# Altium PCB efm8bb1-breakout.PcbDoc
Units mil, origin at the board's own origin, x right, y up, seen from the top; angles counter-clockwise.
Board outline 600 x 800 mil, 2 copper layers (Top Layer, Bottom Layer); 3 components, 16 nets, 32 pads, 0 vias.
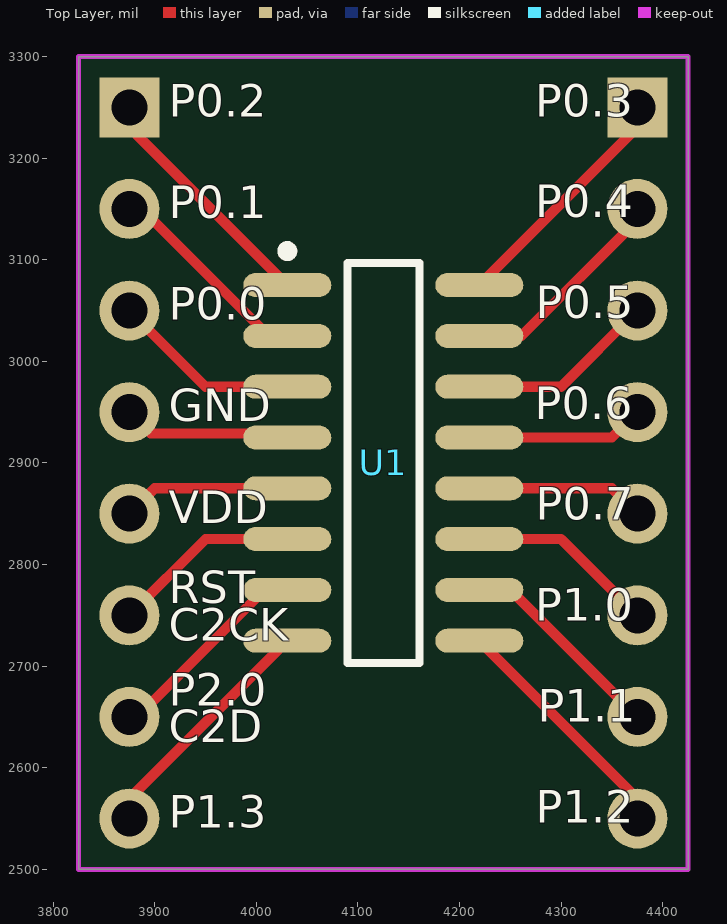
[diagram p0: Top Layer view]
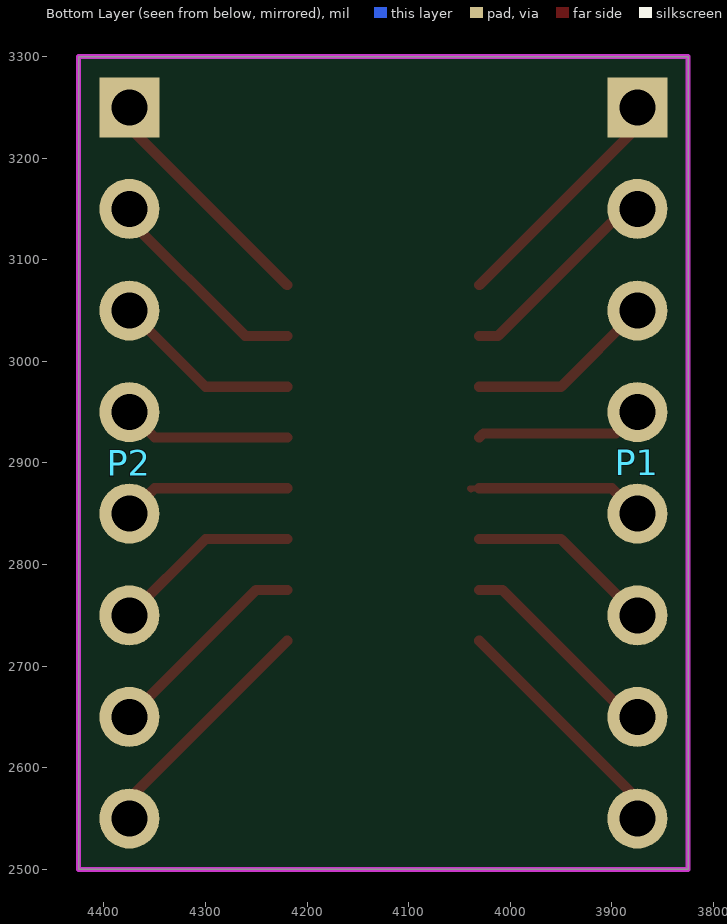
[diagram p1: Bottom Layer view, seen from below]

## Layer stack, top to bottom
Top Solder: solder mask 0.4, Solder Resist, Dk 3.5
Top Layer: signal copper 1.4
Dielectric 1: dielectric 12.6, FR-4, Dk 4.8
Bottom Layer: signal copper 1.4
Bottom Solder: solder mask 0.4, Solder Resist, Dk 3.5

## Board outline
3825,2500 4425,2500 4425,3300 3825,3300

## Design rules (kind name [scope] priority, off if disabled: settings)
Clearance [All] p1: gap=6 ignorepadtopadclearanceinfootprint=FALSE except(0: Arc-Hole Track-Hole SMDPad-Hole THPad-Hole Via-Hole Fill-Hole Poly-Hole Region-Hole Text-Hole)
ComponentClearance [All] p1: gap=0 collisioncheckmode=3 verticalgap=0 showdistances=FALSE
DiffPairsRouting [All] p1: maxlimit=10 minlimit=6 mostfreqgap=10 toplayer_minwidth=6 toplayer_maxwidth=15 toplayer_prefwidth=8 bottomlayer_minwidth=6 bottomlayer_maxwidth=15 bottomlayer_prefwidth=8 maxuncoupledlength=500
HoleSize [All] p1: absolutevalues=TRUE maxlimit=500 minlimit=12 maxpercent=80.000 minpercent=20.000
HoleToHoleClearance [All] p1: gap=0 allowstackedmicrovias=TRUE
MinimumSolderMaskSliver [All] p1: minsoldermaskwidth=0
PlaneConnect [All] p1: planeconnectstyle=Direct reliefexpansion=20 reliefentries=4 reliefconductorwidth=10 reliefairgap=10
PolygonConnect [All] p1: connectstyle=Direct reliefconductorwidth=10 reliefentries=4 polygonreliefangle="90 Angle" airgapwidth=10
RoutingVias [All] p1: holewidth=12 width=24 viastyle="Through Hole" minholewidth=12 minwidth=24 maxholewidth=28 maxwidth=50
SilkToSilkClearance [All] p1: silktosilkclearance=0
SilkToSolderMaskClearance [IsPad] p1: minsilkscreentomaskgap=0 clearancetoexposedcopper=TRUE
SolderMaskExpansion [All] p1: expansion=0
Width [All] p1: maxlimit=500 minlimit=6 preferedwidth=8
22 further rules are at their usual default settings.

## Components (designator, comment, footprint, x,y, rotation, side; value= is the part's Value field where it differs from the comment)
P1 "Header 8" HDR1X8-NOSILK-PINS 3875,3250 r270 bottom
P2 "Header 8" HDR1X8-NOSILK-PINS 4375,3250 r270 bottom
U1 "EFM8BB10F8G-A-SOIC16" SOIC127P600-16N 4125,2900 r0 top

## Footprints (in the part's own frame and the unit in brackets; to place one, negate y for a bottom-side part, rotate by r counter-clockwise, add the part's x,y. Pads: shape width x height; smd on the part's side, far side on the other; paste and mask are expansions set on the pad)
HDR1X8-NOSILK-PINS [mm] "Connector; Header; 8 Position"
  rect 1.5x1.5 hole 0.9: 1(0,0)
  round 1.5 hole 0.9: 2(2.54,0) 3(5.08,0) 4(7.62,0) 5(10.16,0) 6(12.7,0) 7(15.24,0) 8(17.78,0)
  body extent -1.27,-1.22 19.05,1.22, height 10.3
SOIC127P600-16N [mm] "SOIC, 16-Leads, Body 9.9x3.9mm, Pitch 1.27mm, IPC Medium Density"
  oval 2.2x0.6 smd: 1(-2.4,4.445) 2(-2.4,3.175) 3(-2.4,1.905) 4(-2.4,0.635) 5(-2.4,-0.635) 6(-2.4,-1.905) 7(-2.4,-3.175) 8(-2.4,-4.445) 9(2.4,-4.445) 10(2.4,-3.175) 11(2.4,-1.905) 12(2.4,-0.635) 13(2.4,0.635) 14(2.4,1.905) 15(2.4,3.175) 16(2.4,4.445)
  silkscreen extent -2.52,-5 0.9,5.42, body extent -3.01,-4.94 2.99,4.97, height 1.4

## Part data
P1 P2: "Header, 8-Pin", LatestRevisionDate=17-Jul-2002, LatestRevisionNote="Re-released for DXP Platform.", Publisher="Altium Limited"
U1: "IC MCU 8BIT 8KB FLASH 16SOIC", Manufacturer="Silicon Labs", Operating Temperature="-40°C ~ 85°C (TA)", Package / Case="16-SOIC (0.154\", 3.90mm Width)", Supplier Device Package=16-SOIC, Supplier Part Number 1=336-3166-5-ND, Voltage - Supply (Vcc/Vdd)="2.2 V ~ 3.6 V", Category="Integrated Circuits (ICs)", ComponentLink1Description=http://www.silabs.com/documents/public/data-sheets/efm8bb1-datasheet.pdf, ComponentLink1URL=http://www.silabs.com/documents/public/data-sheets/efm8bb1-datasheet.pdf, Connectivity="I²C, SMBus, SPI, UART/USART", Core Processor="CIP-51 8051", Core Size=8-Bit, Data Converters="A/D 12x12b", EEPROM Size=-, Manufacturer Part Number=EFM8BB10F8G-A-SOIC16, Number of I/O=13, Oscillator Type=Internal, Packaging=Tube, Part Status=Active, Peripherals="Brown-out Detect/Reset, POR, PWM, WDT", Pricing 1="1=0.59, 25=0.5372, 100=0.4883, 1000=0.43943 (USD)", Program Memory Size="8KB (8K x 8)", Program Memory Type=FLASH, RAM Size="512 x 8", RoHS="RoHS Compliant", Speed=25MHz, Stock 1=1222, Supplier 1=Digi-Key

## Nets (pads, with @x,y where several pads share a name; then routed paths per layer and width w, separated by ;. In a path a pad name is that pad's centre, name@x,y a point inside that pad or via, vN(x,y) a via of type N, cw(c..) or ccw(c..) an arc to the next point about the centre after c; other vN are vias at no path point)
C2CK: P1.6 U1.6 | length 186.6
  Top Layer w10: P1.6 3950,2825 U1.6
C2D: P1.7 U1.7 | length 207.3
  Top Layer w10: P1.7 3883,2650 4008,2775 U1.7
GND: P1.4 U1.4 | length 165.9
  Top Layer w10: P1.4 3896,2929 4026.51,2929 U1.4
P0.0: P1.3 U1.3 | length 186.6
  Top Layer w10: P1.3 3950,2975 U1.3
P0.1: P1.2 U1.2 | length 207.3
  Top Layer w10: P1.2 3887,3150 4012,3025 U1.2
P0.2: P1.1 U1.1 | length 239.4
  Top Layer w10: P1.1 3875,3230.51 U1.1
P0.3: P2.1 U1.16 | length 239.4
  Top Layer w10: U1.16 4375,3230.51 P2.1
P0.4: P2.2 U1.15 | length 213.7
  Top Layer w10: U1.15 4261,3025 4375,3139 P2.2
P0.5: P2.3 U1.14 | length 186.6
  Top Layer w10: U1.14 4300,2975 P2.3
P0.6: P2.4 U1.13 | length 165.9
  Top Layer w10: U1.13 4350,2925 P2.4
P0.7: P2.5 U1.12 | length 165.9
  Top Layer w10: U1.12 4350,2875 P2.5
P1.0: P2.6 U1.11 | length 186.6
  Top Layer w10: U1.11 4300,2825 P2.6
P1.1: P2.7 U1.10 | length 207.3
  Top Layer w10: U1.10 4250,2775 P2.7
P1.2: P2.8 U1.9 | length 239.4
  Top Layer w10: U1.9 4375,2569.49 P2.8
P1.3: P1.8 U1.8 | length 239.4
  Top Layer w10: P1.8 3875,2569.49 U1.8
VDD: P1.5 U1.5 | length 176.3
  Top Layer w6: U1.5 4039.51,2875 U1.5@4038.51,2874
  Top Layer w10: P1.5 3900,2875 U1.5

## Keep-outs
Keep-Out Layer:
  the board outline again, w5

## Silkscreen, mask and mechanical layers (free items; w line width, h text height)
Top Overlay:
  text "P0.2" at 3914,3230 h55
  text "P0.3" at 4274.65,3230 h55
  text "P0.4" at 4274.42,3130.79 h55
  text "P0.1" at 3914,3130 h55
  text "P0.5" at 4274.98,3031.59 h55
  text "P0.0" at 3914,3030 h55
  text "P0.6" at 4274.27,2932.38 h55
  text "GND" at 3914,2930 h55
  text "P0.7" at 4274.85,2833.18 h55
  text "VDD" at 3914,2829.72 h55
  text "RST" at 3914,2751 h55
  text "P1.0" at 4274.5,2733.97 h55
  text "C2CK" at 3914,2714 h55
  text "P2.0" at 3914,2650 h55
  text "P1.1" at 4277.21,2634.21 h55
  text "C2D" at 3914,2614 h55
  text "P1.2" at 4274.85,2535 h55
  text "P1.3" at 3914,2530 h55